# EAGLE board hipwr-tvbnull-m (EAGLE 5.10)
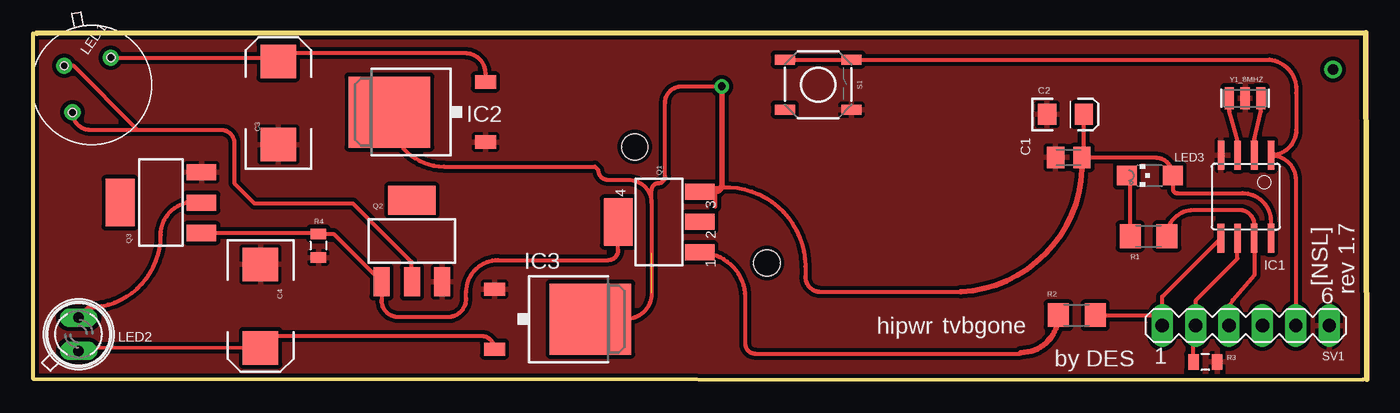
[diagram p0: board, top side]
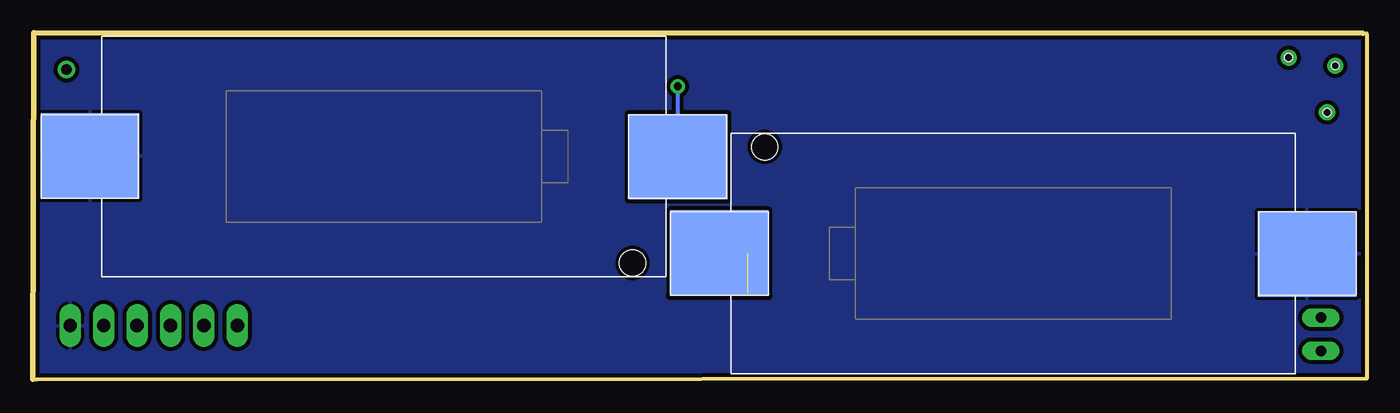
[diagram p1: board, bottom side, seen from below]

Size 101.45 x 26.37 mm. Coordinates in mm from the lower left corner, seen from the top.
Outline: 0.31,26.34 101.4,26.37 101.45,0.03
Outline: 0,26.31 0,0.08 101.17,0
Copper layers (1*16): Top 0.0356mm / dielectric 1.5011mm / Bottom 0.0356mm
Design rules "SparkFun-mod": minimum track width 8mil, minimum drill 20mil, track to track 12mil, track to pad 12mil, pad to pad 8mil, via to via 8mil, smd to smd 8mil, copper to edge 12mil, drill to drill 8mil, minimum pad ring 12mil, minimum via ring 10mil, stop-mask expansion 4mil, vias tented up to drill 25mil, thermal gap 10mil

## Footprints (pad centres in the part's own frame; a part is rotated, then mirrored left to right if it is on the bottom)
KEYSTONE-CR123A-SMT = smd 6.5 x 7.5: P$1 0.02,22.37; P$2 -0.04,-22.34 | hole 2: 8.1,18.915
C0805K = smd 1.3 x 1.6: 1 -1,0; 2 1,0
EIA3216 = smd 1.4 x 1.6: A 1.4,0; C -1.4,0
EIA7343 = smd 2.55 x 2.7: A 3.17,0; C -3.17,0
SOIC8 = smd 0.5 x 2.2: 1 -1.905,-3.154; 2 -0.645,-3.154; 3 0.625,-3.154; 4 1.895,-3.154; 5 1.905,3.154; 6 0.635,3.154; 7 -0.635,3.154; 8 -1.905,3.154
TO252 = smd 1 x 1.6: 1 -2.28,-4.8; 2 2.28,-4.8 | smd 5.4 x 6.2: 3 0,2.5
OD-100 = drill 0.61 round: ANODE 0,2.54; CATHODE -2.54,0; CATHODE2 0,-2.54 | hole 0.61: 0,-2.54; -2.54,0; 0,2.54
SFH482 = drill 0.813 long: A -1.27,0; K 1.27,0
CHIPLED_1206 = smd 1.5 x 1.5: A 0,-1.75; C 0,1.75
SOT223 = smd 1.219 x 2.235: 1 -2.311,-3.099; 2 0,-3.099; 3 2.311,-3.099 | smd 3.6 x 2.2: 4 0,3.099
1206 = smd 1.6 x 1.8: 1 -1.4,0; 2 1.4,0
0805 = smd 0.8 x 1.2: 1 -0.9,0; 2 0.9,0
TACTILE_SWITCH_SMD = smd 1.524 x 0.762: 1 -2.54,1.905; 2 2.54,1.905; 3 -2.54,-1.905; 4 2.54,-1.905
CON-LSTB_MA06-1 = drill 1.016 long: 1 -6.35,0; 2 -3.81,0; 3 -1.27,0; 4 1.27,0; 5 3.81,0; 6 6.35,0
RESONATOR-SMD = smd 0.7 x 1.7: 1 -1.2,0; 2 0,0; 3 1.2,0

## Placement (x,y rotation side)
BAT1  KEYSTONE-1018  [KEYSTONE-CR123A-SMT]  74.75,16.97 270 bottom
BAT2  KEYSTONE-1018  [KEYSTONE-CR123A-SMT]  26.87,9.6 90 bottom
C1  0.1uF  [C0805K]  78.79,16.89 180 top
C2  10uF  [EIA3216]  78.54,20.17 0 top
C3  470uF  [EIA7343]  18.67,21.03 90 top
C4  470uF  [EIA7343]  17.32,5.59 270 top
IC1  ATTINY85V-10S  [SOIC8]  92.26,13.91 180 top
IC2  NCP1117DT18G  [TO252]  29.62,20.35 90 top
IC3  ZLDO1117K15TC  [TO252]  39.9,4.6 270 top
LED1  OD-100-ND  [OD-100]  4.47,22.4 325 top
LED2  TSAL7600  [SFH482]  3.48,3.45 90 top
LED3  [CHIPLED_1206]  84.96,15.52 90 top
Q1  PZTA92  [SOT223]  47.62,11.99 90 top
Q2  FZT649  [SOT223]  28.83,10.54 0 top
Q3  FZT649  [SOT223]  9.73,13.46 90 top
R1  1K  [1206]  84.86,10.9 180 top
R2  1K  [1206]  79.4,4.9 180 top
R3  10K  [0805]  89.18,1.35 180 top
R4  10 K  [0805]  21.72,10.19 270 top
S1  SWITCH  [TACTILE_SWITCH_SMD]  59.73,22.43 0 top
SV1  [CON-LSTB_MA06-1]  92.25,4.11 0 top
Y1_8MHZ  RESONATORSMD  [RESONATOR-SMD]  92.2,21.39 0 top

## Library data of the parts
BAT1 BAT2 = eagle-library-edeca.net-v4
C1 = rcl-ez
C2-C4 Q2 Q3 R1-R4 S1 Y1_8MHZ = SparkFun
IC1 = avr
IC2 IC3 = national-semiconductor; MF: NATIONAL SEMICONDUCTOR; MPN: LM2936DT-3.0; OC_FARNELL: 1286862; OC_NEWARK: 74C4101
LED1 LED2 = led
LED3 = minimidi
Q1 = zetex; MPN: FZT789A; OC_FARNELL: 9526633; OC_NEWARK: 97K0407
SV1 = NSL

## Nets
GND: BAT1.P$2 BAT2.P$2 C1.2 C2.C C3.C C4.C IC1.4 IC2.1 IC3.1 Q2.3 Q3.3 R3.1 R4.2 S1.4 SV1.6 Y1_8MHZ.2
MISO: IC1.6 R3.2 SV1.2
MOSI: IC1.5 R2.1 SV1.1
N$1: IC1.3 Y1_8MHZ.1
N$2: IC1.2 Y1_8MHZ.3
N$3: LED3.C R1.2
N$4: C3.A IC2.2 LED1.ANODE
N$5: LED2.K Q3.2
N$6: Q1.1 R2.2
N$7: Q1.4 Q2.1 Q3.1 R4.1
N$8: LED1.CATHODE LED1.CATHODE2 Q2.2
N$9: C4.A IC3.2 LED2.A
RST: IC1.1 S1.1 S1.2 SV1.5
SCK: IC1.7 R1.1 SV1.3
VCC: BAT1.P$1 BAT2.P$1 C1.1 C2.A IC1.8 IC2.3 IC3.3 LED3.A Q1.3

## Tracks (layer width: path | path; a pad name or v marks a point on that pad's centre or on a via)
GND
  pour Top: 0,2.06 0.03,26.42 101.4,26.34 101.47,-0.03 0.03,0.05
  pour Bottom (isolate 0.305): 0.08,26.37 0.08,-0.05 101.42,-0.05 101.42,26.37
MISO
  Top 0.305: R3.2 88.28,3.95 SV1.2 88.47,4.14 88.47,6.05 91.63,9.2 IC1.6
MOSI
  Top 0.305: IC1.5 85.9,6.3 SV1.1 85.12,4.9 R2.1
N$1
  Top 0.305: IC1.3 91.64,18.12 91.26,19.51 91.01,20.42 Y1_8MHZ.1
N$2
  Top 0.305: IC1.2 arc-90 92.91,16.68 92.91,18.24 93.4,20.38 Y1_8MHZ.3
N$3
  Top 0.305: LED3.C arc-90 83.46,15.27 R1.2
N$4
  Top 0.305: IC2.2 34.42,23.27 arc90 32.84,24.84 19.31,24.84 arc90 C3.A 18.39,24.48 LED1.ANODE
N$5
  Top 0.305: LED2.K 4.22,5.49 arc90 9.73,11 arc-103 Q3.2
N$6
  Top 0.305: Q1.1 arc-90 54.18,6.22 54.18,2.74 arc90 54.94,1.98 75.08,1.98 arc90 75.16,2.06
  Top 0.406: 75.16,2.06 arc90 R2.2
N$7
  Top 0.305: Q3.1 21.46,11.15 R4.1 | R4.1 22.21,11.09 | R4.1 22.87,11.09 Q2.1 26.52,6.02 arc90 27.76,4.78 31.57,4.78 arc90 32.97,6.17 32.97,6.68 arc-90 35.38,9.09 43.76,9.09 arc90 44.53,9.86 Q1.4
N$8
  Top 0.305: LED1.CATHODE2 arc90 4.34,19 7.95,19 | 7.95,19 14.3,19 arc-90 15.32,17.98 15.32,14.94 16.84,13.41 24.33,13.41 28.78,8.97 28.78,7.49 Q2.2 | LED1.CATHODE 3.09,23.86 7.95,19
N$9
  Top 0.305: LED2.A arc90 3.58,2.46 C4.A arc-90 18.07,3.33 34.09,3.33 arc-90 IC3.2
N$10  (via drill 0.81)
  other vias: 98.88,23.57
RST
  Top 0.305: SV1.5 96.06,15.17 arc90 IC1.1 arc90 96.09,18.99 96.09,21.79 arc90 94.06,24.33 S1.2 S1.1
SCK
  Top 0.305: SV1.3 91.01,5.66 91.26,6.05 92.91,7.95 92.91,10.24 IC1.7 92.9,11.78 arc90 91.77,12.9 88.27,12.9 arc90 R1.1
VCC  (via drill 0.6)  (1 unrouted)
  Top 0.305: IC1.8 94.17,12.03 arc90 92.02,14.17 87.04,14.17 arc-90 86.71,14.5 LED3.A arc90 85.34,16.89 C1.1 arc90 79.94,17.04 C2.A | 70.6,6.68 59.89,6.68 arc-90 58.75,7.82 58.75,8.59 arc109 Q1.3 51.89,14.3 51.89,13.16 | IC3.3 45.11,4.6 arc90 47.07,6.55 47.07,13.41 | 47.07,13.41 arc90 45.29,15.19 43.76,15.19 arc-90 43,15.95 42.75,16.21 31.26,16.21 arc-90 IC2.3 | 47.07,13.41 47.07,14.43 arc-90 47.57,14.94 arc90 48.08,15.44 48.08,21.03 arc-90 49.35,22.3 v52.4,22.3
  Top 0.406: 70.6,6.68 arc90 C1.1 | 51.89,14.3 arc90 52.4,14.81 v52.4,22.3
  Bottom 0.305: BAT1.P$1 arc90 52.4,16.97 v52.4,22.3 | BAT2.P$1 arc-90 49.22,9.6 47.07,9.6

## Text on the board
_tsilk: [NSL] | rev 1.7 | hipwr | tvbgone | by DES